# EAGLE board daughterboard (EAGLE 9.6.2)
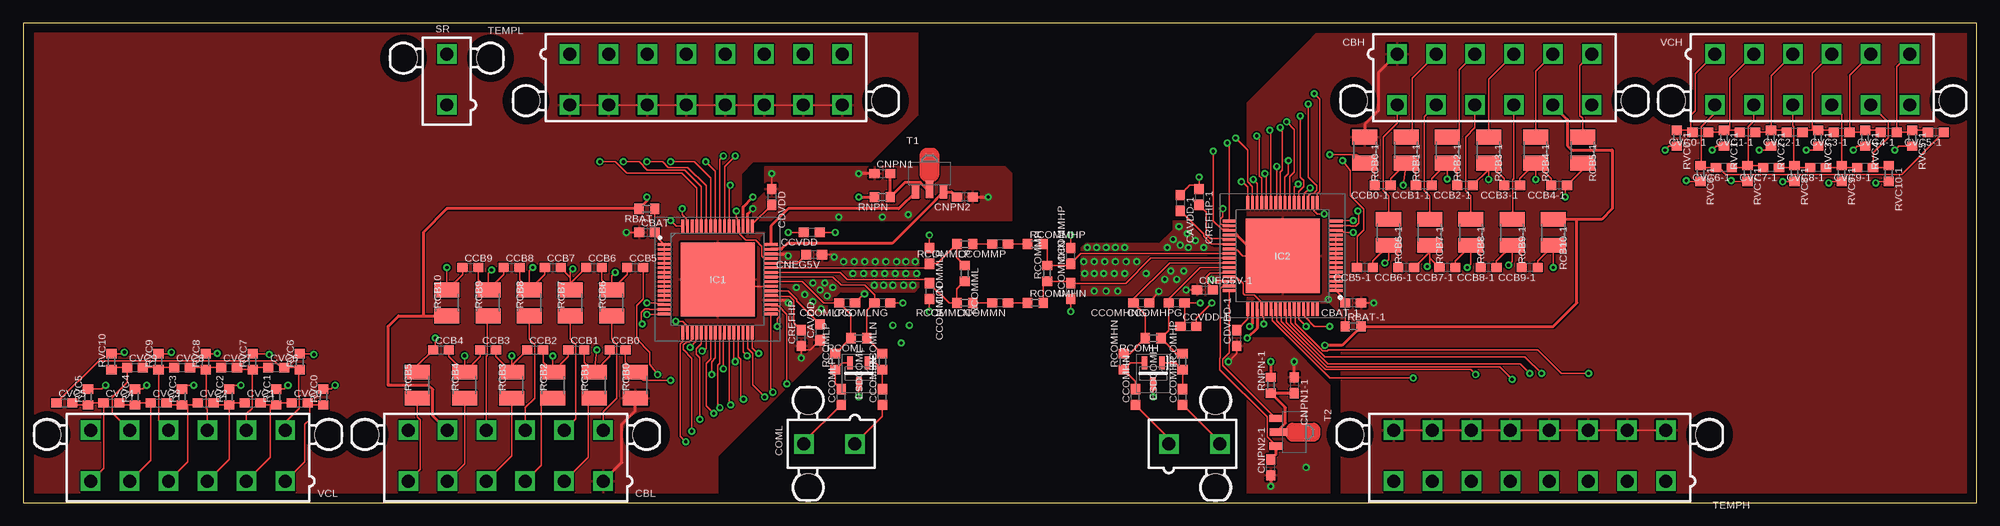
[diagram p0: board, top side]
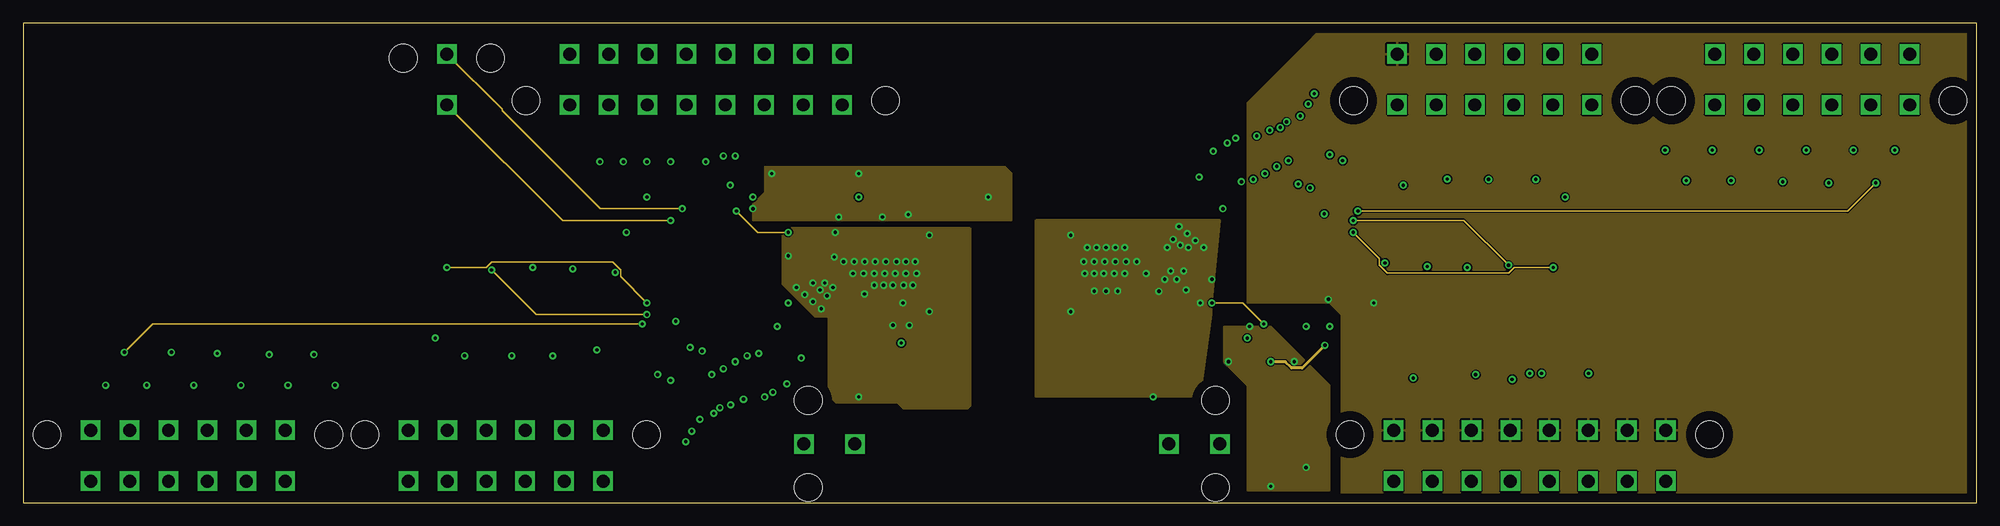
[diagram p1: board, inner layer Route2]
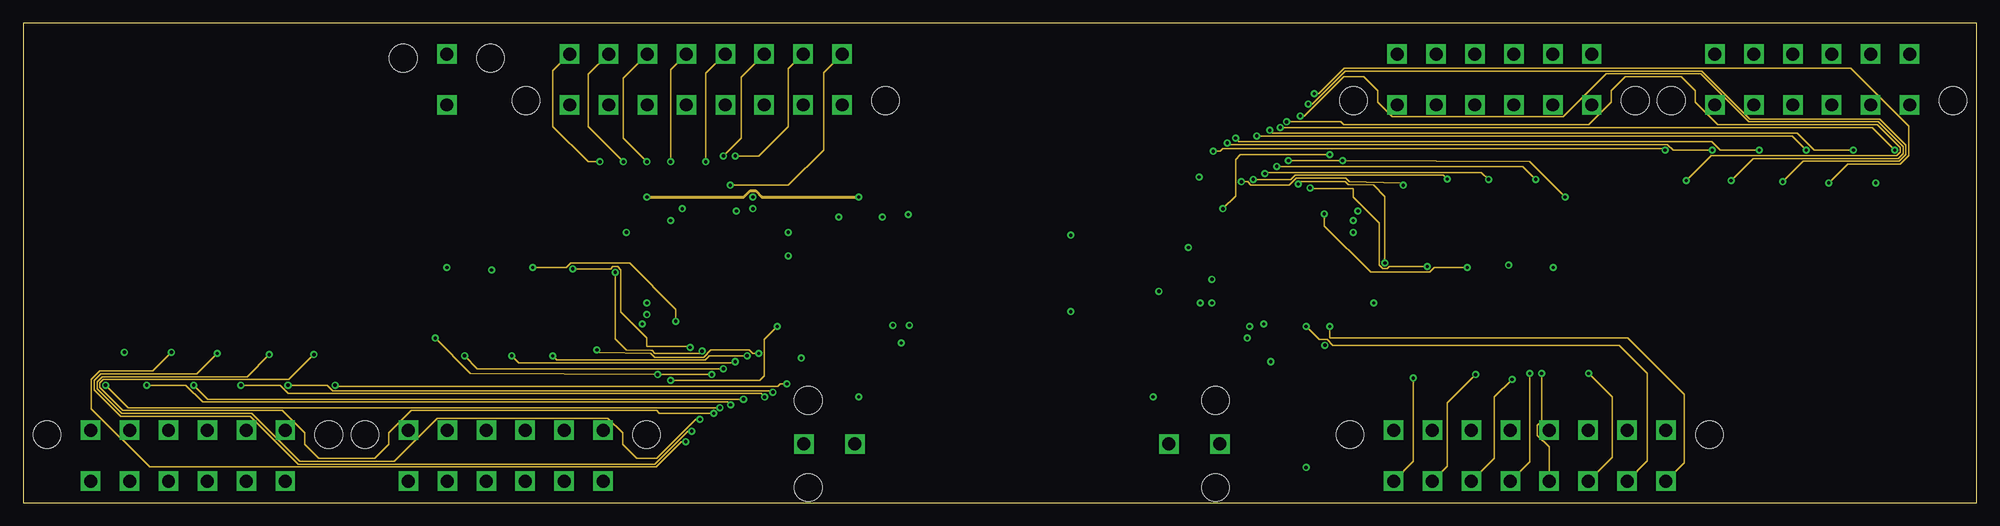
[diagram p2: board, inner layer Route15]
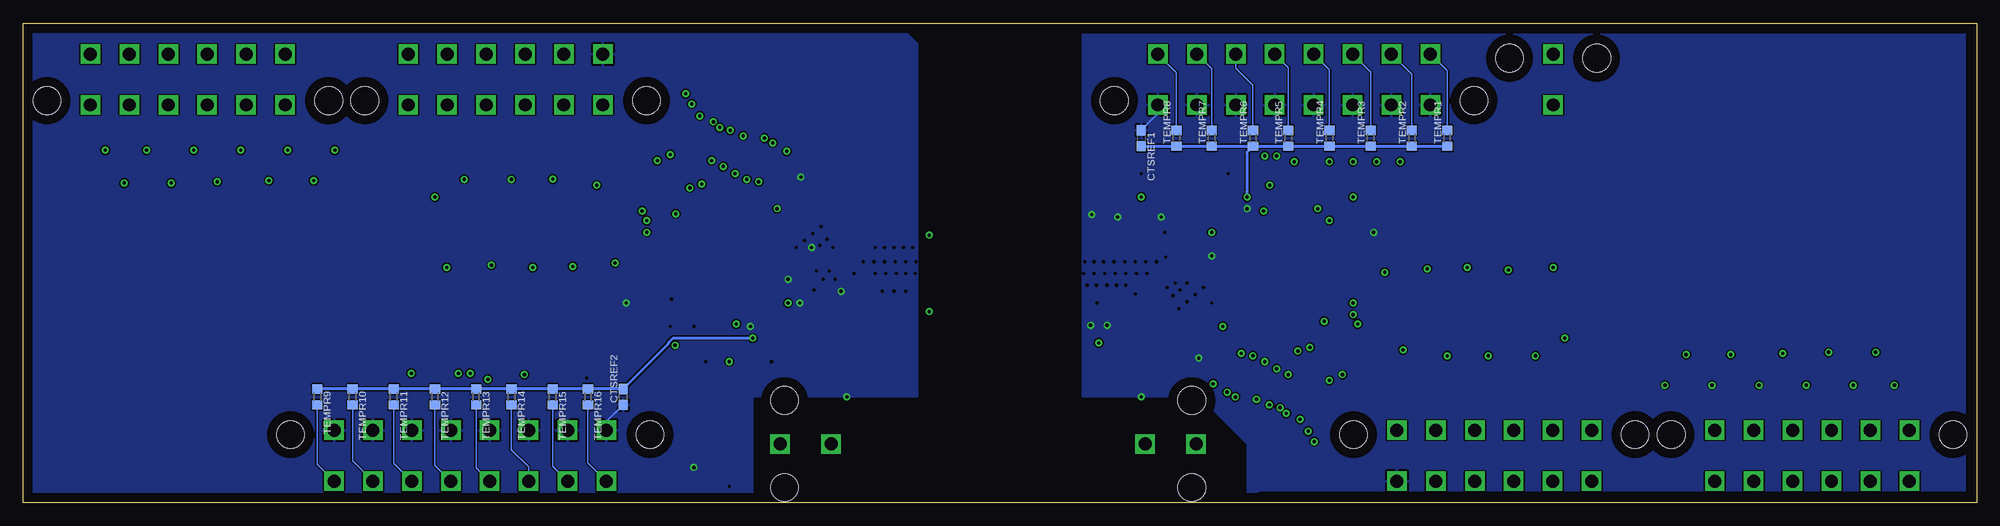
[diagram p3: board, bottom side, seen from below]

Size 210.8 x 51.8 mm. Coordinates in mm from the lower left corner, seen from the top.
Outline: 0,0 210.8,0 210.8,51.8 0,51.8 0,0
Copper layers ([2:[15:1+2*15+16]]): Top 0.035mm / dielectric 0.21mm / Route2 0.035mm / dielectric 1mm / Route15 0.035mm / dielectric 0.21mm / Bottom 0.035mm
Design rules "backup *": minimum track width 6mil, minimum drill 0.35mm, track to track 6mil, track to pad 6mil, pad to pad 6mil, via to via 6mil, smd to smd 6mil, copper to edge 40mil, drill to drill 6mil, minimum pad ring 10mil, minimum via ring 8mil, stop-mask expansion 4mil, vias tented up to drill 0mil, thermal gap 10mil

## Footprints (pad centres in the part's own frame; a part is rotated, then mirrored left to right if it is on the bottom)
C0603 = smd 1.1 x 1: 1 -0.85,0; 2 0.85,0
5566-12 = drill 1.4 square: 1 10.5,-2.75; 2 6.3,-2.75; 3 2.1,-2.75; 4 -2.1,-2.75; 5 -6.3,-2.75; 6 -10.5,-2.75; 7 10.5,2.75; 8 6.3,2.75; 9 2.1,2.75; 10 -2.1,2.75; 11 -6.3,2.75; 12 -10.5,2.75 | hole 3: 15.2,2.29; -15.2,2.29
5566-2 = drill 1.4 square: 1 0,-2.75; 2 0,2.75 | hole 3: 4.7,2.29; -4.7,2.29
SOT95P255X150-3N = smd 1.4 x 0.6: 1 -1.15,0.95; 2 -1.15,-0.95; 3 1.15,0
QFP50P1200X1200X120-65N = smd 1.475 x 0.3: 1 -5.738,3.75; 2 -5.738,3.25; 3 -5.738,2.75; 4 -5.738,2.25; 5 -5.738,1.75; 6 -5.738,1.25; 7 -5.738,0.75; 8 -5.738,0.25; 9 -5.738,-0.25; 10 -5.738,-0.75; 11 -5.738,-1.25; 12 -5.738,-1.75; 13 -5.738,-2.25; 14 -5.738,-2.75; 15 -5.738,-3.25; 16 -5.738,-3.75; 33 5.738,-3.75; 34 5.738,-3.25; 35 5.738,-2.75; 36 5.738,-2.25; 37 5.738,-1.75; 38 5.738,-1.25; 39 5.738,-0.75; 40 5.738,-0.25; 41 5.738,0.25; 42 5.738,0.75; 43 5.738,1.25; 44 5.738,1.75; 45 5.738,2.25; 46 5.738,2.75; 47 5.738,3.25; 48 5.738,3.75 | smd 0.3 x 1.475: 17 -3.75,-5.738; 18 -3.25,-5.738; 19 -2.75,-5.738; 20 -2.25,-5.738; 21 -1.75,-5.738; 22 -1.25,-5.738; 23 -0.75,-5.738; 24 -0.25,-5.738; 25 0.25,-5.738; 26 0.75,-5.738; 27 1.25,-5.738; 28 1.75,-5.738; 29 2.25,-5.738; 30 2.75,-5.738; 31 3.25,-5.738; 32 3.75,-5.738; 49 3.75,5.738; 50 3.25,5.738; 51 2.75,5.738; 52 2.25,5.738; 53 1.75,5.738; 54 1.25,5.738; 55 0.75,5.738; 56 0.25,5.738; 57 -0.25,5.738; 58 -0.75,5.738; 59 -1.25,5.738; 60 -1.75,5.738; 61 -2.25,5.738; 62 -2.75,5.738; 63 -3.25,5.738; 64 -3.75,5.738 | smd 8 x 8: 65 0,0
R0603 = smd 1 x 1.1: 1 -0.85,0; 2 0.85,0
R1210 = smd 1.6 x 2.7: 1 -1.4,0; 2 1.4,0
SOT89-BCE = smd 0.8 x 1.4: B -1.499,-1.981; E 1.499,-1.981 | smd 0.8 x 1.9: C 0,-1.727
5566-16 = drill 1.4 square: 1 14.7,-2.75; 2 10.5,-2.75; 3 6.3,-2.75; 4 2.1,-2.75; 5 -2.1,-2.75; 6 -6.3,-2.75; 7 -10.5,-2.75; 8 -14.7,-2.75; 9 14.7,2.75; 10 10.5,2.75; 11 6.3,2.75; 12 2.1,2.75; 13 -2.1,2.75; 14 -6.3,2.75; 15 -10.5,2.75; 16 -14.7,2.75 | hole 3: 19.4,2.29; -19.4,2.29

## Placement (x,y rotation side)
CAVDD  1uf  [C0603]  85.98,18.41 90 top
CAVDD-1  1uf  [C0603]  124.84,32.38 270 top
CBAT  10 nf  [C0603]  67.31,29.21 0 top
CBAT-1  10 nf  [C0603]  143.51,21.59 180 top
CBH  5566-12  [5566-12]  158.75,45.72 180 top
CBL  5566-12  [5566-12]  52.07,5.08 0 top
CCB0  0.47uf  [C0603]  64.14,16.51 0 top
CCB0-1  0.47uf  [C0603]  146.69,34.29 180 top
CCB1  0.47uf  [C0603]  59.69,16.51 0 top
CCB1-1  0.47uf  [C0603]  151.13,34.29 180 top
CCB2  0.47uf  [C0603]  55.24,16.51 0 top
CCB2-1  0.47uf  [C0603]  155.57,34.29 180 top
CCB3  0.47uf  [C0603]  50.16,16.51 0 top
CCB3-1  0.47uf  [C0603]  160.66,34.29 180 top
CCB4  0.47uf  [C0603]  45.09,16.51 0 top
CCB4-1  0.47uf  [C0603]  165.74,34.29 180 top
CCB5  0.47uf  [C0603]  66.04,25.4 0 top
CCB5-1  0.47uf  [C0603]  144.78,25.4 180 top
CCB6  0.47uf  [C0603]  61.59,25.4 0 top
CCB6-1  0.47uf  [C0603]  149.22,25.4 180 top
CCB7  0.47uf  [C0603]  57.15,25.4 0 top
CCB7-1  0.47uf  [C0603]  153.67,25.4 180 top
CCB8  0.47uf  [C0603]  52.7,25.4 0 top
CCB8-1  0.47uf  [C0603]  158.12,25.4 180 top
CCB9  0.47uf  [C0603]  48.26,25.4 0 top
CCB9-1  0.47uf  [C0603]  162.56,25.4 180 top
CCOMHN  2.2nf  [C0603]  120.02,11.43 90 top
CCOMHNG  220 pF  [C0603]  120.65,21.59 180 top
CCOMHP  2.2nf  [C0603]  125.09,11.43 90 top
CCOMHPG  220 pF  [C0603]  124.46,21.59 180 top
CCOMLN  2.2nf  [C0603]  92.71,11.43 90 top
CCOMLNG  220 pF  [C0603]  92.71,21.59 180 top
CCOMLP  2.2nf  [C0603]  88.27,11.43 90 top
CCOMLPG  220 pF  [C0603]  88.9,21.59 180 top
CCOMMHN  220pf  [C0603]  113.03,22.86 90 top
CCOMMHP  220pf  [C0603]  113.03,26.67 90 top
CCOMMLN  220pf  [C0603]  97.79,22.86 270 top
CCOMMLP  220pf  [C0603]  97.79,26.67 270 top
CCOMMN  2.2nf  [C0603]  105.41,21.59 180 top
CCOMMP  2.2nf  [C0603]  105.41,27.94 180 top
CCVDD  4.7uf  [C0603]  85.09,29.21 180 top
CCVDD-1  4.7uf  [C0603]  125.73,19.05 0 top
CDVDD  1uf  [C0603]  80.77,33.02 270 top
CDVDD-1  1uf  [C0603]  130.94,17.78 90 top
CNEG5V  0.1uf  [C0603]  85.34,26.8 180 top
CNEG5V-1  0.1uf  [C0603]  127.51,22.99 0 top
CNPN1  0.22uf  [C0603]  92.71,35.56 0 top
CNPN1-1  0.22uf  [C0603]  137.16,12.7 270 top
CNPN2  0.1uf  [C0603]  101.6,33.02 180 top
CNPN2-1  0.1uf  [C0603]  134.62,3.81 90 top
COMH  5566-2  [5566-2]  126.36,6.35 270 top
COML  5566-2  [5566-2]  87,6.35 90 top
CREFHP  1uf  [C0603]  83.95,17.78 90 top
CREFHP-1  1uf  [C0603]  126.87,33.02 270 top
CTSREF1  1 uF  [C0603]  90.17,39.37 270 bottom
CTSREF2  1 uF  [C0603]  146.05,11.43 90 bottom
CVC0  0.47uf  [C0603]  29.84,10.79 0 top
CVC0-1  0.47uf  [C0603]  180.97,40.01 180 top
CVC1  0.47uf  [C0603]  24.77,10.79 0 top
CVC1-1  0.47uf  [C0603]  186.06,40.01 180 top
CVC2  0.47uf  [C0603]  19.68,10.79 0 top
CVC2-1  0.47uf  [C0603]  191.13,40.01 180 top
CVC3  0.47uf  [C0603]  14.61,10.79 0 top
CVC3-1  0.47uf  [C0603]  196.22,40.01 180 top
CVC4  0.47uf  [C0603]  9.53,10.79 0 top
CVC4-1  0.47uf  [C0603]  201.29,40.01 180 top
CVC5  0.47uf  [C0603]  4.45,10.79 0 top
CVC5-1  0.47uf  [C0603]  206.38,40.01 180 top
CVC6  0.47uf  [C0603]  27.3,14.61 0 top
CVC6-1  0.47uf  [C0603]  183.51,36.2 180 top
CVC7  0.47uf  [C0603]  22.23,14.61 0 top
CVC7-1  0.47uf  [C0603]  188.59,36.2 180 top
CVC8  0.47uf  [C0603]  17.14,14.61 0 top
CVC8-1  0.47uf  [C0603]  193.68,36.2 180 top
CVC9  0.47uf  [C0603]  12.06,14.61 0 top
CVC9-1  0.47uf  [C0603]  198.75,36.2 180 top
ESDCOMH  ESDAVLC6-2BLY  [SOT95P255X150-3N]  121.92,13.97 270 top
ESDCOML  ESDAVLC6-2BLY  [SOT95P255X150-3N]  90.17,13.97 270 top
IC1  PBQ79656PAPTQ1  [QFP50P1200X1200X120-65N]  74.93,24.13 0 top
IC2  PBQ79656PAPTQ1  [QFP50P1200X1200X120-65N]  135.89,26.67 180 top
RBAT  30  [R0603]  67.31,31.75 180 top
RBAT-1  30  [R0603]  143.51,19.05 0 top
RCB0  10  [R1210]  66.04,12.7 90 top
RCB0-1  10  [R1210]  144.78,38.1 270 top
RCB1  10  [R1210]  61.59,12.7 90 top
RCB1-1  10  [R1210]  149.22,38.1 270 top
RCB2  10  [R1210]  57.15,12.7 90 top
RCB2-1  10  [R1210]  153.67,38.1 270 top
RCB3  10  [R1210]  52.7,12.7 90 top
RCB3-1  10  [R1210]  158.12,38.1 270 top
RCB4  10  [R1210]  47.62,12.7 90 top
RCB4-1  10  [R1210]  163.19,38.1 270 top
RCB5  10  [R1210]  42.55,12.7 90 top
RCB5-1  10  [R1210]  168.28,38.1 270 top
RCB6  10  [R1210]  63.5,21.59 90 top
RCB6-1  10  [R1210]  147.32,29.21 270 top
RCB7  10  [R1210]  59.05,21.59 90 top
RCB7-1  10  [R1210]  151.76,29.21 270 top
RCB8  10  [R1210]  54.61,21.59 90 top
RCB8-1  10  [R1210]  156.21,29.21 270 top
RCB9  10  [R1210]  50.16,21.59 90 top
RCB9-1  10  [R1210]  160.66,29.21 270 top
RCB10  10  [R1210]  45.72,21.59 90 top
RCB10-1  10  [R1210]  165.1,29.21 270 top
RCOMH  1k  [R0603]  121.92,17.78 180 top
RCOMHN  49  [R0603]  118.75,15.24 90 top
RCOMHP  49  [R0603]  125.09,15.24 90 top
RCOML  1k  [R0603]  90.17,17.78 180 top
RCOMLN  49  [R0603]  92.71,15.24 90 top
RCOMLP  49  [R0603]  87.63,15.24 90 top
RCOMMH  1k  [R0603]  110.49,24.77 90 top
RCOMMHN  49  [R0603]  109.22,21.59 0 top
RCOMMHP  49  [R0603]  109.22,27.94 0 top
RCOMML  1k  [R0603]  101.6,24.77 270 top
RCOMMLN  49  [R0603]  101.6,21.59 180 top
RCOMMLP  49  [R0603]  101.6,27.94 180 top
RNPN  49  [R0603]  92.71,33.02 180 top
RNPN-1  49  [R0603]  134.62,12.7 90 top
RVC0  100  [R0603]  32.38,11.43 90 top
RVC0-1  100  [R0603]  178.44,39.37 270 top
RVC1  100  [R0603]  27.3,11.43 90 top
RVC1-1  100  [R0603]  183.51,39.37 270 top
RVC2  100  [R0603]  22.23,11.43 90 top
RVC2-1  100  [R0603]  188.59,39.37 270 top
RVC3  100  [R0603]  17.14,11.43 90 top
RVC3-1  100  [R0603]  193.68,39.37 270 top
RVC4  100  [R0603]  12.06,11.43 90 top
RVC4-1  100  [R0603]  198.75,39.37 270 top
RVC5  100  [R0603]  6.99,11.43 90 top
RVC5-1  100  [R0603]  203.84,39.37 270 top
RVC6  100  [R0603]  29.84,15.24 90 top
RVC6-1  100  [R0603]  180.97,35.56 270 top
RVC7  100  [R0603]  24.77,15.24 90 top
RVC7-1  100  [R0603]  186.06,35.56 270 top
RVC8  100  [R0603]  19.68,15.24 90 top
RVC8-1  100  [R0603]  191.13,35.56 270 top
RVC9  100  [R0603]  14.61,15.24 90 top
RVC9-1  100  [R0603]  196.22,35.56 270 top
RVC10  100  [R0603]  9.53,15.24 90 top
RVC10-1  100  [R0603]  201.29,35.56 270 top
SR  5566-2  [5566-2]  45.72,45.72 0 top
T1  PBHV8115X, 115  [SOT89-BCE]  97.79,35.56 0 top
T2  PBHV8115X, 115  [SOT89-BCE]  137.16,7.62 270 top
TEMPH  5566-16  [5566-16]  162.56,5.08 0 top
TEMPL  5566-16  [5566-16]  73.66,45.72 180 top
TEMPR1  10k  [R0603]  57.15,39.37 90 bottom
TEMPR2  10k  [R0603]  60.96,39.37 90 bottom
TEMPR3  10k  [R0603]  65.41,39.37 90 bottom
TEMPR4  10k  [R0603]  69.85,39.37 90 bottom
TEMPR5  10k  [R0603]  74.3,39.37 90 bottom
TEMPR6  10k  [R0603]  78.11,39.37 90 bottom
TEMPR7  10k  [R0603]  82.55,39.37 90 bottom
TEMPR8  10k  [R0603]  86.36,39.37 90 bottom
TEMPR9  10k  [R0603]  179.07,11.43 270 bottom
TEMPR10  10k  [R0603]  175.26,11.43 270 bottom
TEMPR11  10k  [R0603]  170.81,11.43 270 bottom
TEMPR12  10k  [R0603]  166.37,11.43 270 bottom
TEMPR13  10k  [R0603]  161.93,11.43 270 bottom
TEMPR14  10k  [R0603]  158.12,11.43 270 bottom
TEMPR15  10k  [R0603]  153.67,11.43 270 bottom
TEMPR16  10k  [R0603]  149.86,11.43 270 bottom
VCH  5566-12  [5566-12]  193.04,45.72 180 top
VCL  5566-12  [5566-12]  17.78,5.08 0 top

## Library data of the parts
CAVDD CAVDD-1 CBAT CBAT-1 CCB0 CCB0-1 CCB1 CCB1-1 CCB2 CCB2-1 CCB3 CCB3-1 CCB4 CCB4-1 CCB5 CCB5-1 CCB6 CCB6-1 CCB7 CCB7-1 CCB8 CCB8-1 CCB9 CCB9-1 CCOMHN CCOMHNG CCOMHP CCOMHPG CCOMLN CCOMLNG CCOMLP CCOMLPG CCOMMHN CCOMMHP CCOMMLN CCOMMLP CCOMMN CCOMMP CCVDD CCVDD-1 CDVDD CDVDD-1 CNEG5V CNEG5V-1 CNPN1 CNPN1-1 CNPN2 CNPN2-1 CREFHP CREFHP-1 CTSREF1 CTSREF2 CVC0 CVC0-1 CVC1 CVC1-1 CVC2 CVC2-1 CVC3 CVC3-1 CVC4 CVC4-1 CVC5 CVC5-1 CVC6 CVC6-1 CVC7 CVC7-1 CVC8 CVC8-1 CVC9 CVC9-1 = rcl; SPICEPREFIX: C
CBH CBL TEMPH TEMPL VCH VCL = con-molex; MF: MOLEX; OC_FARNELL: unknown; OC_NEWARK: unknown
COMH COML SR = con-molex; MF: MOLEX; OC_FARNELL: 1822072; OC_NEWARK: unknown
ESDCOMH ESDCOML = ESDAVLC6-2BLY; DESCRIPTION: STMICROELECTRONICS - ESDAVLC6-2BLY - ESD Protection Device, 17 V, SOT-23, 3 Pins, 5 V, 140 W, ESDA Transil Series; HEIGHT: 1.5mm; MANUFACTURER_NAME: STMicroelectronics; MANUFACTURER_PART_NUMBER: ESDAVLC6-2BLY; MOUSER_PART_NUMBER: 511-ESDAVLC6-2BLY; MOUSER_PRICE-STOCK: https://www.mouser.co.uk/ProductDetail/STMicroelectronics/ESDAVLC6-2BLY?qs=l7cgNqFNU1iH2e21evvYsA%3D%3D
IC1 IC2 = PBQ79656PAPTQ1; DESCRIPTION: BQ7965x-Q1 Family of 12S, 14S, 16S Precision Automotive Battery Monitor, Balancer and Integrated Hardware Protector with up to SafeTITM-26262 ASIL-D Compliance; HEIGHT: 1.2mm; MANUFACTURER_NAME: Texas Instruments; MANUFACTURER_PART_NUMBER: PBQ79656PAPTQ1
RBAT RBAT-1 RCB0 RCB0-1 RCB1 RCB1-1 RCB2 RCB2-1 RCB3 RCB3-1 RCB4 RCB4-1 RCB5 RCB5-1 RCB6 RCB6-1 RCB7 RCB7-1 RCB8 RCB8-1 RCB9 RCB9-1 RCB10 RCB10-1 RCOMH RCOMHN RCOMHP RCOML RCOMLN RCOMLP RCOMMH RCOMMHN RCOMMHP RCOMML RCOMMLN RCOMMLP RNPN RNPN-1 RVC0 RVC0-1 RVC1 RVC1-1 RVC2 RVC2-1 RVC3 RVC3-1 RVC4 RVC4-1 RVC5 RVC5-1 RVC6 RVC6-1 RVC7 RVC7-1 RVC8 RVC8-1 RVC9 RVC9-1 RVC10 RVC10-1 TEMPR1-TEMPR16 = rcl; SPICEPREFIX: R
T1 T2 = transistor

## Nets
BATC: CBL.11 RBAT.2 RCB10.1 RNPN.2
BATC-1: CBH.11 RBAT-1.2 RCB10-1.1 RNPN-1.2
CB0: CCB0.2 IC1.34 RCB0.2
CB0-1: CCB0-1.2 IC2.34 RCB0-1.2
CB1: CCB0.1 CCB1.2 IC1.32 RCB1.2
CB1-1: CCB0-1.1 CCB1-1.2 IC2.32 RCB1-1.2
CB2: CCB1.1 CCB2.2 IC1.30 RCB2.2
CB2-1: CCB1-1.1 CCB2-1.2 IC2.30 RCB2-1.2
CB3: CCB2.1 CCB3.2 IC1.28 RCB3.2
CB3-1: CCB2-1.1 CCB3-1.2 IC2.28 RCB3-1.2
CB4: CCB3.1 CCB4.2 IC1.26 RCB4.2
CB4-1: CCB3-1.1 CCB4-1.2 IC2.26 RCB4-1.2
CB5: CCB4.1 CCB5.2 IC1.24 RCB5.2
CB5-1: CCB4-1.1 CCB5-1.2 IC2.24 RCB5-1.2
CB6: CCB5.1 CCB6.2 IC1.22 RCB6.2
CB6-1: CCB5-1.1 CCB6-1.2 IC2.22 RCB6-1.2
CB7: CCB6.1 CCB7.2 IC1.20 RCB7.2
CB7-1: CCB6-1.1 CCB7-1.2 IC2.20 RCB7-1.2
CB8: CCB7.1 CCB8.2 IC1.18 RCB8.2
CB8-1: CCB7-1.1 CCB8-1.2 IC2.18 RCB8-1.2
CB9: CCB8.1 CCB9.2 IC1.16 RCB9.2
CB9-1: CCB8-1.1 CCB9-1.2 IC2.16 RCB9-1.2
CB10: CCB9.1 IC1.14 RCB10.2
CB10-1: CCB9-1.1 IC2.14 RCB10-1.2
COMHN: CCOMHN.1 COMH.1
COMHP: CCOMHP.1 COMH.2
COMLN: CCOMLN.1 COML.1
COMLP: CCOMLP.1 COML.2
COMMN: CCOMMN.1 RCOMMHN.1
COMMP: CCOMMP.1 RCOMMHP.1
CVDD: CCVDD.2 IC1.45 IC1.52
CVDD-1: CCVDD-1.2 IC2.45 IC2.52
GNDH: CAVDD-1.1 CBAT-1.1 CBH.1 CCOMHNG.1 CCOMHPG.1 CCOMMHN.1 CCOMMHP.2 CCVDD-1.1 CDVDD-1.1 CNEG5V-1.1 CNPN1-1.1 CNPN2-1.1 CREFHP-1.1 CTSREF2.1 ESDCOMH.3 IC2.36 IC2.39 IC2.46 IC2.50 IC2.65 RCB0-1.1 TEMPH.9 TEMPH.10 TEMPH.11 TEMPH.12 TEMPH.13 TEMPH.14 TEMPH.15 TEMPH.16
GNDL: CAVDD.1 CBAT.1 CBL.1 CCOMLNG.1 CCOMLPG.1 CCOMMLN.2 CCOMMLP.1 CCVDD.1 CDVDD.1 CNEG5V.1 CNPN1.1 CNPN2.1 CREFHP.1 CTSREF1.1 ESDCOML.3 IC1.36 IC1.39 IC1.46 IC1.50 IC1.65 RCB0.1 TEMPL.9 TEMPL.10 TEMPL.11 TEMPL.12 TEMPL.13 TEMPL.14 TEMPL.15 TEMPL.16
LDOIN: CNPN2.2 IC1.47 T1.E
LDOIN-1: CNPN2-1.2 IC2.47 T2.E
N$1: CCOMHP.2 ESDCOMH.1 RCOMHP.1
N$2: CCOMHN.2 ESDCOMH.2 RCOMHN.1
N$4: IC1.64 SR.1
N$5: CBL.2 RCB1.1
N$6: CBL.3 RCB2.1
N$7: IC1.63 SR.2
N$8: CBL.4 RCB3.1
N$12: CBL.5 RCB4.1
N$15: CBL.6 RCB5.1
N$18: CBL.9 RCB8.1
N$21: CBL.10 RCB9.1
N$27: CBL.7 RCB6.1
N$29: CCOMLNG.2 IC1.41 RCOML.1 RCOMLN.2
N$31: CBL.8 RCB7.1
N$33: CREFHP.2 IC1.37
N$34: CVC0.2 RVC0.1 VCL.1
N$35: CVC0.1 CVC1.2 RVC1.1 VCL.2
N$36: CVC1.1 CVC2.2 RVC2.1 VCL.3
N$37: CVC2.1 CVC3.2 RVC3.1 VCL.4
N$38: CVC3.1 CVC4.2 RVC4.1 VCL.5
N$39: CVC4.1 CVC5.2 RVC5.1 VCL.6
N$40: CVC5.1 CVC6.2 RVC6.1 VCL.7
N$41: CVC6.1 CVC7.2 RVC7.1 VCL.8
N$42: CVC7.1 CVC8.2 RVC8.1 VCL.9
N$43: CVC8.1 CVC9.2 RVC9.1 VCL.10
N$44: CVC9.1 RVC10.1 VCL.11
N$46: CAVDD.2 IC1.38
N$48: CNEG5V.2 IC1.44
N$49: CCOMLPG.2 IC1.40 RCOML.2 RCOMLP.2
N$50: CDVDD.2 IC1.49
N$59: CCOMMLN.1 IC1.42 RCOMML.2 RCOMMLN.2
N$60: CCOMMLP.2 IC1.43 RCOMML.1 RCOMMLP.2
N$61: CCOMMN.2 RCOMMLN.1
N$62: CCOMMP.2 RCOMMLP.1
N$65: CNPN1.2 RNPN.1 T1.C
N$67: CCOMLP.2 ESDCOML.2 RCOMLP.1
N$68: CCOMLN.2 ESDCOML.1 RCOMLN.1
N$72: CBH.3 RCB2-1.1
N$73: CBH.2 RCB1-1.1
N$75: CBH.4 RCB3-1.1
N$78: CBH.5 RCB4-1.1
N$81: CBH.6 RCB5-1.1
N$84: CBH.7 RCB6-1.1
N$87: CBH.8 RCB7-1.1
N$90: CBH.9 RCB8-1.1
N$93: CBH.10 RCB9-1.1
N$99: CVC0-1.2 RVC0-1.1 VCH.1
N$100: CVC0-1.1 CVC1-1.2 RVC1-1.1 VCH.2
N$101: CVC1-1.1 CVC2-1.2 RVC2-1.1 VCH.3
N$102: CVC2-1.1 CVC3-1.2 RVC3-1.1 VCH.4
N$103: CVC3-1.1 CVC4-1.2 RVC4-1.1 VCH.5
N$104: CVC4-1.1 CVC5-1.2 RVC5-1.1 VCH.6
N$105: CVC5-1.1 CVC6-1.2 RVC6-1.1 VCH.7
N$106: CVC6-1.1 CVC7-1.2 RVC7-1.1 VCH.8
N$107: CVC7-1.1 CVC8-1.2 RVC8-1.1 VCH.9
N$108: CVC8-1.1 CVC9-1.2 RVC9-1.1 VCH.10
N$109: CVC9-1.1 RVC10-1.1 VCH.11
N$111: CREFHP-1.2 IC2.37
N$112: CAVDD-1.2 IC2.38
N$113: CNEG5V-1.2 IC2.44
N$114: CDVDD-1.2 IC2.49
N$125: CCOMMHN.2 IC2.41 RCOMMH.1 RCOMMHN.2
N$126: CCOMMHP.1 IC2.40 RCOMMH.2 RCOMMHP.2
N$130: CNPN1-1.2 RNPN-1.1 T2.C
N$131: CCOMHPG.2 IC2.43 RCOMH.1 RCOMHP.2
N$132: CCOMHNG.2 IC2.42 RCOMH.2 RCOMHN.2
NPNB: IC1.48 T1.B
NPNB-1: IC2.48 T2.B
TEMP1: IC1.61 TEMPL.1 TEMPR1.2
TEMP2: IC1.60 TEMPL.2 TEMPR2.2
TEMP3: IC1.59 TEMPL.3 TEMPR3.2
TEMP4: IC1.58 TEMPL.4 TEMPR4.2
TEMP5: IC1.57 TEMPL.5 TEMPR5.2
TEMP6: IC1.56 TEMPL.6 TEMPR6.2
TEMP7: IC1.55 TEMPL.7 TEMPR7.2
TEMP8: IC1.54 TEMPL.8 TEMPR8.2
TEMP9: IC2.61 TEMPH.1 TEMPR9.2
TEMP10: IC2.60 TEMPH.2 TEMPR10.2
TEMP11: IC2.59 TEMPH.3 TEMPR11.2
TEMP12: IC2.58 TEMPH.4 TEMPR12.2
TEMP13: IC2.57 TEMPH.5 TEMPR13.2
TEMP14: IC2.56 TEMPH.6 TEMPR14.2
TEMP15: IC2.55 TEMPH.7 TEMPR15.2
TEMP16: IC2.54 TEMPH.8 TEMPR16.2
TSREF: CTSREF1.2 IC1.51 TEMPR1.1 TEMPR2.1 TEMPR3.1 TEMPR4.1 TEMPR5.1 TEMPR6.1 TEMPR7.1 TEMPR8.1
TSREF-1: CTSREF2.2 IC2.51 TEMPR9.1 TEMPR10.1 TEMPR11.1 TEMPR12.1 TEMPR13.1 TEMPR14.1 TEMPR15.1 TEMPR16.1
VC0: IC1.35 RVC0.2
VC0-1: IC2.35 RVC0-1.2
VC1: IC1.33 RVC1.2
VC1-1: IC2.33 RVC1-1.2
VC2: IC1.31 RVC2.2
VC2-1: IC2.31 RVC2-1.2
VC3: IC1.29 RVC3.2
VC3-1: IC2.29 RVC3-1.2
VC4: IC1.27 RVC4.2
VC4-1: IC2.27 RVC4-1.2
VC5: IC1.25 RVC5.2
VC5-1: IC2.25 RVC5-1.2
VC6: IC1.23 RVC6.2
VC6-1: IC2.23 RVC6-1.2
VC7: IC1.21 RVC7.2
VC7-1: IC2.21 RVC7-1.2
VC8: IC1.19 RVC8.2
VC8-1: IC2.19 RVC8-1.2
VC9: IC1.17 RVC9.2
VC9-1: IC2.17 RVC9-1.2
VC10: IC1.15 RVC10.2
VC10-1: IC2.15 RVC10-1.2
VC_CB_HIGH: CBAT.2 IC1.1 IC1.2 IC1.3 IC1.4 IC1.5 IC1.6 IC1.7 IC1.8 IC1.9 IC1.10 IC1.11 IC1.12 IC1.13 RBAT.1
VC_CB_HIGH-1: CBAT-1.2 IC2.1 IC2.2 IC2.3 IC2.4 IC2.5 IC2.6 IC2.7 IC2.8 IC2.9 IC2.10 IC2.11 IC2.12 IC2.13 RBAT-1.1

## Tracks (layer width: path | path; a pad name or v marks a point on that pad's centre or on a via)
BATC  (via drill 0.35)
  Top 0.305: CBL.11 44.2,9.4 44.2,12.23 43.73,12.7 39.37,12.7 39.37,19.05 40.51,20.19 43.18,20.19 | 43.18,20.19 RCB10.1 | 43.18,20.19 43.18,29.21 45.72,31.75 RBAT.2 67.31,32.6 v67.31,33.02 | v90.17,33.02 RNPN.2
  Route15 0.305: v67.31,33.02 77.77,33.02 78.46,33.7 79.02,33.7 79.71,33.02 v90.17,33.02
BATC-1  (via drill 0.35)
  Top 0.305: CBH.11 166.62,41.4 166.62,38.57 167.09,38.1 171.45,38.1 171.45,31.75 170.31,30.61 167.64,30.61 | 167.64,30.61 RCB10-1.1 | 167.64,30.61 167.64,21.59 165.1,19.05 RBAT-1.2 142.33,17.02 v140.46,17.02 | v134.62,15.24 RNPN-1.2
  Route2 0.305: v134.62,15.24 136.19,15.24 136.88,14.56 138,14.56 v140.46,17.02
CB0  (via drill 0.35)
  Top 0.152: CCB0.2 64.98,15.15 RCB0.2 66.93,13.21 v69.85,13.21 | IC1.34 80.79,20.76 81.5,20.76 81.63,20.62 81.63,20.14 81.37,19.87 v81.37,19.05
  Route15 0.152: v81.37,19.05 79.98,17.66 79.98,13.72 79.47,13.21 v69.85,13.21
CB0-1  (via drill 0.35)
  Top 0.152: CCB0-1.2 145.84,35.65 RCB0-1.2 143.89,37.59 v140.97,37.59 | IC2.34 130.03,30.04 129.32,30.04 129.19,30.18 129.19,30.66 129.45,30.93 v129.45,31.75
  Route15 0.152: v129.45,31.75 130.84,33.14 130.84,37.08 131.35,37.59 v140.97,37.59
CB1  (via drill 0.35)
  Top 0.152: RCB1.2 63.28,15.79 CCB0.1 | RCB1.2 60.54,15.15 CCB1.2 | RCB1.2 v61.91,16.51 | v79.38,16.13 79.25,16.13 78.68,16.7 IC1.32
  Route15 0.152: v61.91,16.51 62.17,16.25 67.73,16.13 68.14,15.72 73.46,15.72 74.22,16.48 78.36,16.48 78.71,16.13 v79.38,16.13
CB1-1  (via drill 0.35)
  Top 0.152: RCB1-1.2 147.53,35.01 CCB0-1.1 | RCB1-1.2 150.28,35.65 CCB1-1.2 | RCB1-1.2 v148.91,34.29 | v131.44,34.67 131.56,34.67 132.14,34.1 IC2.32
  Route15 0.152: v148.91,34.29 148.65,34.55 143.09,34.67 142.68,35.08 137.36,35.08 136.6,34.32 132.46,34.32 132.11,34.67 v131.44,34.67
CB2  (via drill 0.35)
  Top 0.152: RCB2.2 58.84,15.79 CCB1.1 | RCB2.2 56.09,15.15 CCB2.2 | RCB2.2 v57.15,15.85 | IC1.30 77.68,16.3 v78.11,15.88
  Route15 0.152: v78.11,15.88 74.04,15.88 73.58,15.42 57.58,15.42 v57.15,15.85
CB2-1  (via drill 0.35)
  Top 0.152: RCB2-1.2 151.98,35.01 CCB1-1.1 | RCB2-1.2 154.72,35.65 CCB2-1.2 | RCB2-1.2 v153.67,34.95 | IC2.30 133.14,34.5 v132.72,34.92
  Route15 0.152: v132.72,34.92 136.78,34.92 137.24,35.38 153.24,35.38 v153.67,34.95
CB3  (via drill 0.35)
  Top 0.152: RCB3.2 52.7,14.82 CCB2.1 | RCB3.2 51.02,15.79 CCB3.2 | RCB3.2 v52.7,15.88 | v76.83,15.24 76.68,15.39 IC1.28
  Route15 0.152: v52.7,15.88 53.47,15.11 76.71,15.11 v76.83,15.24
CB3-1  (via drill 0.35)
  Top 0.152: RCB3-1.2 158.12,35.98 CCB2-1.1 | RCB3-1.2 159.81,35.01 CCB3-1.2 | RCB3-1.2 v158.12,34.92 | v133.99,35.56 134.14,35.41 IC2.28
  Route15 0.152: v158.12,34.92 157.35,35.69 134.11,35.69 v133.99,35.56
CB4  (via drill 0.35)
  Top 0.152: RCB4.2 49.31,15.79 CCB3.1 | RCB4.2 45.94,15.79 CCB4.2 | RCB4.2 v47.62,15.88 | v75.56,14.48 75.56,18.28 IC1.26
  Route15 0.152: v75.56,14.48 49.02,14.48 v47.62,15.88
CB4-1  (via drill 0.35)
  Top 0.152: RCB4-1.2 161.5,35.01 CCB3-1.1 | RCB4-1.2 164.88,35.01 CCB4-1.2 | RCB4-1.2 v163.19,34.92 | v135.25,36.32 135.25,32.52 IC2.26
  Route15 0.152: v135.25,36.32 161.8,36.32 v163.19,34.92
CB5  (via drill 0.35)
  Top 0.152: RCB5.2 42.55,14.82 CCB4.1 44.45,16.73 v44.45,17.78 | v74.3,13.84 74.3,15.24 74.68,15.62 IC1.24 | v68.45,13.84 67.62,14.93 67.62,16.27 66.19,17.69 66.19,21.33 66.89,22.03 CCB5.2
  Route15 0.152: v44.45,17.78 48.26,13.97 v68.45,13.84 v74.3,13.84
CB5-1  (via drill 0.35)
  Top 0.152: RCB5-1.2 168.28,35.98 CCB4-1.1 166.37,34.08 v166.37,33.02 | v136.53,36.96 136.53,35.56 136.14,35.17 IC2.24 | v142.37,36.96 143.2,35.87 143.2,33.17 144.62,31.75 144.62,29.47 143.93,28.77 CCB5-1.2
  Route15 0.152: v166.37,33.02 162.56,36.83 v142.37,36.96 v136.53,36.96
CB6  (via drill 0.35)
  Top 0.152: RCB6.2 62.45,24.05 CCB6.2 | RCB6.2 65.19,24.68 CCB5.1 | RCB6.2 63.5,24.51 v63.88,24.89 | IC1.22 73.68,16.64 73.5,16.64 v73.25,16.38
  Route15 0.152: v63.88,24.89 63.88,17.7 65.09,16.49 67.74,16.43 67.86,16.43 68.17,16.13 73,16.13 v73.25,16.38
CB6-1  (via drill 0.35)
  Top 0.152: RCB6-1.2 148.38,26.75 CCB6-1.2 | RCB6-1.2 145.63,26.12 CCB5-1.1 | RCB6-1.2 147.32,26.29 v146.94,25.91 | IC2.22 137.14,34.16 137.31,34.16 v137.57,34.42
  Route15 0.152: v146.94,25.91 146.94,33.1 145.73,34.31 143.08,34.37 142.96,34.37 142.65,34.67 137.82,34.67 v137.57,34.42
CB7  (via drill 0.35)
  Top 0.152: RCB7.2 59.05,24.34 CCB7.2 | RCB7.2 59.05,23.71 CCB6.1 | RCB7.2 59.05,25.02 v59.31,25.27 | v71.96,16.79 72.59,17.42 72.59,18.3 IC1.20
  Route15 0.152: v59.31,25.27 63.4,25.27 63.63,25.5 64.13,25.5 64.49,25.14 64.49,20.6 67.31,17.78 67.31,16.87 71.88,16.87 v71.96,16.79
CB7-1  (via drill 0.35)
  Top 0.152: RCB7-1.2 151.76,26.45 CCB7-1.2 | RCB7-1.2 151.76,27.09 CCB6-1.1 | RCB7-1.2 151.76,25.78 v151.51,25.53 | v138.86,34.01 138.23,33.38 138.23,32.49 IC2.20
  Route15 0.152: v151.51,25.53 147.42,25.53 147.19,25.3 146.69,25.3 146.33,25.66 146.33,30.2 143.51,33.02 143.51,33.93 138.94,33.93 v138.86,34.01
CB8  (via drill 0.35)
  Top 0.152: RCB8.2 53.55,24.05 CCB8.2 | RCB8.2 56.3,24.68 CCB7.1 | RCB8.2 54.61,25.02 v54.99,25.4 | IC1.18 71.56,18.51 71.56,19.22 71.18,19.6 v70.42,19.6
  Route15 0.152: v54.99,25.4 58.58,25.4 59.06,25.88 65.43,25.88 70.42,20.89 v70.42,19.6
CB8-1  (via drill 0.35)
  Top 0.152: RCB8-1.2 157.26,26.75 CCB8-1.2 | RCB8-1.2 154.52,26.12 CCB7-1.1 | RCB8-1.2 156.21,25.78 v155.83,25.4 | IC2.18 139.26,32.29 139.26,31.58 139.64,31.2 v140.4,31.2
  Route15 0.152: v155.83,25.4 152.24,25.4 151.76,24.92 145.39,24.92 140.4,29.91 v140.4,31.2
CB9  (via drill 0.35)
  Top 0.152: RCB9.2 49.11,24.05 CCB9.2 | RCB9.2 51.85,24.68 CCB8.1 | RCB9.2 50.16,24.77 v50.55,25.15 | v67.31,20.32 69.13,20.32 IC1.16
  Route2 0.152: v50.55,25.15 55.37,20.32 v67.31,20.32
CB9-1  (via drill 0.35)
  Top 0.152: RCB9-1.2 161.71,26.75 CCB9-1.2 | RCB9-1.2 158.97,26.12 CCB8-1.1 | RCB9-1.2 160.66,26.04 v160.27,25.65 | v143.51,30.48 141.69,30.48 IC2.16
  Route2 0.152: v160.27,25.65 155.45,30.48 v143.51,30.48
CB10  (via drill 0.35)
  Top 0.152: CCB9.1 47.41,24.68 RCB10.2 v45.72,25.4 | v67.31,21.59 68.27,21.59 68.36,21.5 69.07,21.5 IC1.14
  Route2 0.152: v45.72,25.4 49.94,25.4 50.55,26.01 63.62,26.01 64.49,25.14 64.49,24.41 v67.31,21.59
CB10-1  (via drill 0.35)
  Top 0.152: CCB9-1.1 163.41,26.12 RCB10-1.2 v165.1,25.4 | v143.51,29.21 142.55,29.21 142.46,29.3 141.75,29.3 IC2.14
  Route2 0.152: v165.1,25.4 160.88,25.4 160.27,24.79 147.2,24.79 146.33,25.66 146.33,26.39 v143.51,29.21
COMHN
  Top 0.152: CCOMHN.1 123.61,6.98 COMH.1
COMHP
  Top 0.152: CCOMHP.1 129.12,6.56 COMH.2
COMLN
  Top 0.152: CCOMLN.1 92.71,9.31 COML.1
COMLP
  Top 0.152: CCOMLP.1 84.25,6.56 COML.2
COMMN
  Top 0.152: CCOMMN.1 RCOMMHN.1
COMMP
  Top 0.152: CCOMMP.1 RCOMMHP.1
CVDD  (via drill 0.35)
  Top 0.152: IC1.45 80.55,26.5 79.84,26.5 79.7,26.64 79.7,27.68 79.03,28.36 77.98,28.36 77.3,29.04 77.3,29.75 IC1.52 77.06,29.99 77.06,30.7 76.96,30.8 v76.96,31.5 | v82.55,29.21 CCVDD.2
  Route2 0.152: v76.96,31.5 79.25,29.21 v82.55,29.21
CVDD-1  (via drill 0.35)
  Top 0.152: IC2.45 130.27,24.3 130.98,24.3 131.63,23.66 131.63,22.61 131.79,22.44 132.84,22.44 133.52,21.76 133.52,21.05 IC2.52 133.76,20.81 133.76,20.1 133.86,20 v133.86,19.3 | v128.27,21.59 126.58,19.9 CCVDD-1.2
  Route2 0.152: v133.86,19.3 131.57,21.59 v128.27,21.59
GNDH  (via drill 0.35, 0.35 layers 1-2)
  Top 0.152: ESDCOMH.3 v121.92,11.43 | CCOMMHN.1 v113.03,20.64 | CCOMMHP.2 v113.03,28.89 | CCOMHNG.1 v122.56,22.83 | v127,21.59 CCOMHPG.1 125.31,19.48 CCVDD-1.1 | CDVDD-1.1 130.94,16.13 v130.05,15.24 | CREFHP-1.1 126.87,34.29 | 126.87,34.29 v126.87,35.18 | CAVDD-1.1 125.9,34.29 126.87,34.29 | TEMPH.9 TEMPH.10 TEMPH.11 TEMPH.12 TEMPH.13 TEMPH.14 TEMPH.15 TEMPH.16 | CBAT-1.1 v145.73,21.59 | CNEG5V-1.1 v125.48,22.99 | IC2.39 130.27,27.3 130.98,27.3 131.61,26.67 134.62,26.67 IC2.65
  Top 0.305: IC2.50 132.64,19.36 v132.33,19.05 | IC2.46 128.48,23.92 v128.27,24.13 | CNPN1-1.1 v137.16,15.24 | RCB0-1.1 144.78,40.89 146.22,42.33 146.22,46.44 CBH.1 | CNPN2-1.1 v134.62,1.78 | 134.62,26.67 133.22,26.67 130.97,28.92 IC2.36
  Bottom 0.152: CTSREF2.1 147.86,8.77 TEMPH.16
  other vias: 124.84,27.81 124.08,28.45 123.44,27.56 120.14,26.04 118.87,27.56 117.86,27.56 116.84,27.56 115.82,27.56 114.81,27.56 119,26.04 117.86,26.04 116.71,26.04 115.57,26.04 114.43,26.04 114.55,24.77 115.57,24.77 116.59,24.77 117.73,24.77 118.87,24.77 121.16,24.77 127.38,27.56 126.49,28.32 125.6,29.08 124.71,29.84 125.73,27.56 138.43,3.81 115.57,22.86 116.84,22.86 118.11,22.86 123.19,24.13 123.83,25.02 125.22,25.02 124.46,24.13 140.84,21.97
  pour Top: 114.17,22.35 114.17,27.56 114.68,28.07 122.43,28.07 122.56,27.94 124.08,29.46 124.08,30.48 125.48,30.48 128.4,27.56 129.16,27.56 129.16,22.35
  pour Route2: 109.22,11.43 127,11.43 128.27,20.32 128.27,21.34 129.16,30.48 129.03,30.61 109.35,30.61 109.22,30.48
  pour Top: 140.97,0 140.97,12.7 135.89,17.78 129.54,17.78 129.54,15.24 132.08,12.7 132.08,0
  pour Route2: 132.08,1.27 140.97,1.27 140.97,12.7 134.62,19.05 129.54,19.05 129.54,15.24 132.08,12.7
  pour Top: 142.24,0 210.82,0 210.82,50.8 139.7,50.8 138.43,49.53 132.08,43.18 132.08,21.59 140.97,21.59 142.24,20.32
  pour Route2: 142.24,0 210.82,0 210.82,50.8 139.7,50.8 138.43,49.53 132.08,43.18 132.08,21.59 140.97,21.59 142.24,20.32
  pour Bottom: 132.08,0 210.82,0 210.82,52.07 116.84,52.07 114.3,49.53 114.3,11.43 132.08,11.43
GNDL  (via drill 0.35, 0.35 layers 1-2)
  Top 0.152: CCOMMLP.1 v97.79,28.89 | CCOMMLN.2 v97.79,20.64 | CDVDD.1 v80.77,35.56 | v87.5,26.54 87.25,26.8 CNEG5V.1 | CREFHP.1 83.95,16.51 | 83.95,16.51 v83.95,15.62 | CAVDD.1 84.92,16.51 83.95,16.51 | v90.78,22.54 90.7,22.54 CCOMLPG.1 | CCOMLNG.1 v94.93,21.59 | ESDCOML.3 v90.17,11.43 | TEMPL.9 TEMPL.10 TEMPL.11 TEMPL.12 TEMPL.13 TEMPL.14 TEMPL.15 TEMPL.16 | CBAT.1 v65.09,29.21 | CCVDD.1 v87.63,29.21 | IC1.39 75.68,23.38 IC1.65
  Top 0.305: CNPN2.1 v104.14,33.02 | IC1.50 78.18,31.19 v78.74,31.75 | IC1.46 82.34,26.88 v82.55,26.67 | IC1.36 82.26,21.88 v82.55,21.59 | CNPN1.1 v90.17,35.56 | RCB0.1 66.04,9.91 64.6,8.47 64.6,4.36 CBL.1
  Bottom 0.152: CTSREF1.1 88.36,42.03 TEMPL.16
  other vias: 85.22,23.75 88.52,26.04 85.98,22.99 86.74,22.35 87.38,23.24 86.49,23.75 89.53,24.77 90.68,24.77 91.82,23.5 92.84,23.5 93.85,23.5 95,23.5 96.01,23.5 91.82,24.77 92.96,24.77 94.11,24.77 95.25,24.77 96.39,24.77 96.27,26.04 95.25,26.04 94.23,26.04 93.09,26.04 91.95,26.04 90.81,26.04 89.66,26.04 83.44,23.24 84.33,22.48 85.22,21.72 86.11,20.95 95.5,31.11 92.71,30.86 88.01,30.86 93.85,19.18 95.63,19.18
  pour Top: 96.65,27.18 96.65,23.24 96.14,22.73 88.39,22.73 88.27,22.86 86.74,21.34 86.74,20.32 85.34,20.32 82.42,23.24 81.66,23.24 81.66,27.18
  pour Top: 80.01,30.48 78.74,30.48 78.74,32.26 78.87,32.38 80.01,33.53 80.01,36.32 105.92,36.32 106.68,35.56 106.68,31.75 106.68,30.48
  pour Top: 82.55,22.86 83.44,21.97 83.44,20.45 86.11,17.78 86.36,17.78 86.36,16.51 82.55,12.7 74.93,5.08 74.93,0 1.27,0 1.27,52.07 95.25,52.07 96.52,50.8 96.52,41.91 93.98,39.37 91.44,36.83 78.74,36.83 77.47,35.56 77.47,30.48 77.47,29.21 80.01,29.21 79.5,28.7 79.5,27.56 79.5,23.37 80.01,22.86
  pour Route2: 81.92,29.72 102.11,29.72 102.23,29.59 102.23,10.54 101.85,10.16 95,10.16 94.36,10.79 87.76,10.79 86.87,11.68 86.87,19.94 87,20.07 85.47,20.07 81.92,23.62
  pour Bottom: 1.27,50.8 96.52,50.8 96.52,11.43 83.82,11.43 78.74,6.35 78.74,0 77.47,1.27 1.27,1.27
  pour Route2: 80.01,30.48 78.74,30.48 78.74,32.26 78.87,32.38 80.01,33.53 80.01,36.32 105.92,36.32 106.68,35.56 106.68,31.75 106.68,30.48
LDOIN
  Top 0.305: CNPN2.2 100.19,33.58 T1.E 98.5,32.78 98.5,32.76 93.75,28.02 82.45,28.02 81.81,27.38 IC1.47
LDOIN-1
  Top 0.152: IC2.47 130.03,23.3 129.32,23.3 129.19,23.16 129.19,15.67 129.14,15.62 129.14,14.37 134.25,9.26 134.25,7.13 135.18,6.2 T2.E
  Top 0.305: T2.E 135.18,5.22 CNPN2-1.2
N$1
  Top 0.152: ESDCOMH.1 124.36,15.12 RCOMHP.1 CCOMHP.2
N$2
  Top 0.152: ESDCOMH.2 119.47,15.12 RCOMHN.1 120.02,13.12 CCOMHN.2
N$4  (via drill 0.35)
  Top 0.152: IC1.64 70.46,29.87 v69.85,30.48
  Route2 0.152: v69.85,30.48 58.21,30.48 SR.1
N$5
  Top 0.152: RCB1.1 61.47,11.43 60.96,11.43 60.96,4.92 CBL.2
N$6
  Top 0.152: RCB2.1 57.09,11.37 57.02,11.43 55.88,11.43 55.88,4.04 CBL.3
N$7  (via drill 0.35)
  Top 0.152: IC1.63 71.56,29.99 71.56,30.7 71.12,31.14 v71.12,31.75
  Route2 0.152: SR.2 51.67,42.52 51.67,42.36 62.27,31.75 v71.12,31.75
N$8
  Top 0.152: CBL.4 52.4,4.75 52.7,5.07 RCB3.1
N$12
  Top 0.152: CBL.5 47.62,4.18 RCB4.1
N$14  (via drill 0.35)
  other vias: 94.74,17.27
N$15
  Top 0.152: RCB5.1 42.55,9.28 42.85,8.97 42.85,3.61 CBL.6
N$18
  Top 0.152: CBL.9 54.17,10.29 55.17,11.29 55.17,17.11 54.61,17.67 RCB8.1
N$21
  Top 0.152: CBL.10 49.97,15.79 50.09,15.91 50.09,20.12 RCB9.1
N$27
  Top 0.152: CBL.7 62.57,9.8 64.06,11.29 64.06,17.11 63.5,17.67 RCB6.1
N$29
  Top 0.152: IC1.41 87.38,24.38 88.27,23.5 90.81,23.5 91.86,22.44 CCOMLNG.2 91.02,20.75 RCOML.1 RCOMLN.2
N$31
  Top 0.152: RCB7.1 59.05,17.67 59.62,17.11 59.62,9.08 CBL.8
N$33
  Top 0.152: IC1.37 80.79,22.26 82.74,22.26 83.16,21.84 83.16,19.42 CREFHP.2
N$34
  Top 0.152: RVC0.1 30.91,10.58 30.91,10.59 | 30.91,10.59 CVC0.2 | 30.91,10.59 30.91,8.96 30.39,8.44 30.39,4.44 VCL.1
N$35
  Top 0.152: CVC0.1 27.52,10.79 RVC1.1 26.67,10.58 | 26.67,10.58 25.83,10.58 CVC1.2 | VCL.2 26.67,4.92 26.67,10.58
N$36
  Top 0.152: CVC1.1 22.44,10.79 RVC2.1 | RVC2.1 20.75,10.58 CVC2.2 | VCL.3 22.23,4.67 RVC2.1
N$37
  Top 0.152: CVC2.1 18.62,10.58 17.78,10.58 | 17.78,10.58 RVC3.1 15.67,10.58 CVC3.2 | VCL.4 17.78,4.43 17.78,10.58
N$38
  Top 0.152: CVC4.2 10.59,10.58 RVC4.1 12.28,10.79 CVC3.1 13.76,4.61 VCL.5
N$39
  Top 0.152: CVC5.2 5.51,10.58 RVC5.1 7.2,10.79 CVC4.1 8.68,3.73 VCL.6
N$40
  Top 0.152: RVC6.1 29.74,14.5 | 29.74,14.5 29.63,14.61 CVC6.2 27.83,14.61 27.1,15.33 8.13,15.33 CVC5.1 | VCL.7 28.28,8.71 29.77,10.2 29.77,11.39 29.74,11.43 29.74,14.5
N$41
  Top 0.152: CVC6.1 24.98,14.61 24.87,14.5 RVC7.1 | RVC7.1 23.29,14.39 CVC7.2 | VCL.8 24.08,9.59 24.69,10.2 24.69,14.32 RVC7.1
N$42
  Top 0.152: CVC7.1 19.9,14.61 RVC8.1 | RVC8.1 19.58,14.5 19.47,14.61 CVC8.2 | VCL.9 19.88,10.08 19.76,10.2 19.76,14.32 RVC8.1
N$43
  Top 0.152: CVC8.1 14.82,14.61 RVC9.1 | RVC9.1 14.39,14.61 CVC9.2 | VCL.10 14.61,8.9 RVC9.1
N$44
  Top 0.152: RVC10.1 9.74,14.61 CVC9.1 11.21,13.01 9.6,11.39 9.6,9.71 VCL.11
N$46
  Top 0.152: CAVDD.2 83.46,21.78 83.46,21.97 82.55,22.88 IC1.38
N$48
  Top 0.152: IC1.44 83.58,25.88 CNEG5V.2
N$49
  Top 0.152: IC1.40 84.07,23.88 86.36,21.59 CCOMLPG.2 89.32,20.32 RCOML.2 RCOMLP.2
N$50
  Top 0.152: CDVDD.2 78.68,30.08 IC1.49
N$59
  Top 0.152: RCOMML.2 100.75,23.07 RCOMMLN.2 99.91,21.59 CCOMMLN.1 97.79,24.13 88.9,24.13 88.15,24.88 IC1.42
N$60
  Top 0.152: IC1.43 97.35,25.38 CCOMMLP.2 98.63,25.82 RCOMMLP.2 100.75,26.46 RCOMML.1
N$61
  Top 0.152: RCOMMLN.1 CCOMMN.2
N$62
  Top 0.152: RCOMMLP.1 CCOMMP.2
N$65
  Top 0.305: T1.C 97.57,33.83 96.82,34.58 95.12,34.58 RNPN.1 CNPN1.2
N$67
  Top 0.152: ESDCOML.2 88.36,15.12 RCOMLP.1 87.63,12.91 CCOMLP.2
N$68
  Top 0.152: ESDCOML.1 91.98,15.12 RCOMLN.1 CCOMLN.2
N$72
  Top 0.152: CBH.3 154.94,46.76 154.94,39.37 153.8,39.37 RCB2-1.1
N$73
  Top 0.152: RCB1-1.1 149.35,39.37 149.86,39.37 149.86,45.88 CBH.2
N$75
  Top 0.152: CBH.4 158.12,45.73 RCB3-1.1
N$78
  Top 0.152: CBH.5 163.19,46.62 RCB4-1.1
N$81
  Top 0.152: RCB5-1.1 168.28,41.52 167.97,41.83 167.97,47.19 CBH.6
N$84
  Top 0.152: CBH.7 148.25,41 146.76,39.51 146.76,33.7 147.32,33.13 RCB6-1.1
N$87
  Top 0.152: RCB7-1.1 151.76,33.13 151.2,33.7 151.2,41.72 CBH.8
N$90
  Top 0.152: CBH.9 156.65,40.51 155.65,39.51 155.65,33.7 156.21,33.13 RCB8-1.1
N$93
  Top 0.152: CBH.10 160.85,35.01 160.73,34.88 160.73,30.68 RCB9-1.1
N$99
  Top 0.152: RVC0-1.1 179.91,40.22 | 179.91,40.22 CVC0-1.2 | 179.91,40.22 179.91,41.84 180.43,42.36 180.43,46.36 VCH.1
N$100
  Top 0.152: CVC0-1.1 183.3,40.01 RVC1-1.1 184.15,40.22 | 184.15,40.22 184.99,40.22 CVC1-1.2 | VCH.2 184.15,45.88 184.15,40.22
N$101
  Top 0.152: CVC1-1.1 188.38,40.01 RVC2-1.1 | RVC2-1.1 190.07,40.22 CVC2-1.2 | VCH.3 188.59,46.12 RVC2-1.1
N$102
  Top 0.152: CVC2-1.1 192.2,40.22 193.04,40.22 | 193.04,40.22 RVC3-1.1 195.15,40.22 CVC3-1.2 | VCH.4 193.04,46.37 193.04,40.22
N$103
  Top 0.152: CVC4-1.2 200.23,40.22 RVC4-1.1 198.54,40.01 CVC3-1.1 197.06,46.2 VCH.5
N$104
  Top 0.152: CVC5-1.2 205.31,40.22 RVC5-1.1 203.62,40.01 CVC4-1.1 202.15,47.08 VCH.6
N$105
  Top 0.152: RVC6-1.1 181.08,36.3 | 181.08,36.3 181.19,36.2 CVC6-1.2 182.99,36.2 183.72,35.47 202.69,35.47 CVC5-1.1 | VCH.7 182.54,42.09 181.05,40.6 181.05,39.41 181.08,39.37 181.08,36.3
N$106
  Top 0.152: CVC6-1.1 185.84,36.2 RVC7-1.1 | RVC7-1.1 187.53,36.41 CVC7-1.2 | VCH.8 186.74,41.21 186.13,40.6 186.13,36.48 RVC7-1.1
N$107
  Top 0.152: CVC7-1.1 190.92,36.2 RVC8-1.1 | RVC8-1.1 191.35,36.2 CVC8-1.2 | VCH.9 190.94,40.72 191.06,40.6 191.06,36.48 RVC8-1.1
N$108
  Top 0.152: CVC8-1.1 196,36.2 RVC9-1.1 | RVC9-1.1 196.43,36.2 CVC9-1.2 | VCH.10 196.22,41.9 RVC9-1.1
N$109
  Top 0.152: RVC10-1.1 201.08,36.2 CVC9-1.1 199.6,37.79 201.22,39.41 201.22,41.09 VCH.11
N$111
  Top 0.152: IC2.37 130.03,28.54 128.08,28.54 127.66,28.96 127.66,31.38 CREFHP-1.2
N$112
  Top 0.152: CAVDD-1.2 127.36,29.02 127.36,28.83 128.27,27.92 IC2.38
N$113
  Top 0.152: IC2.44 130.03,24.8 128.08,24.8 127.66,24.38 127.66,23.88 128.36,23.18 CNEG5V-1.2
N$114
  Top 0.152: CDVDD-1.2 132.14,19.83 IC2.49
N$125
  Top 0.152: RCOMMHN.2 110.07,23.5 RCOMMH.1 112.83,23.91 CCOMMHN.2 118.96,23.71 121.67,26.42 IC2.41
N$126
  Top 0.152: RCOMMHP.2 110.49,27.52 RCOMMH.2 112.83,25.61 CCOMMHP.1 114.13,26.92 127.89,26.92 128.27,26.92 IC2.40
N$130
  Top 0.305: CNPN1-1.2 RNPN-1.1 136.18,10.29 136.18,8.59 135.43,7.84 T2.C
N$131
  Top 0.152: IC2.43 130.13,25.4 127,25.4 123.61,22.01 CCOMHPG.2 123.61,18.62 RCOMH.1 124.46,16.09 RCOMHP.2
N$132
  Top 0.152: IC2.42 123.71,25.92 119.8,22.01 CCOMHNG.2 121.07,20.32 RCOMH.2 119.38,16.09 RCOMHN.2
NPNB
  Top 0.305: T1.B 94.46,31.75 82.55,31.75 80.67,29.87 IC1.48
NPNB-1
  Top 0.152: IC2.48 130.15,16.2 129.44,15.49 129.44,14.86 T2.B
TEMP1  (via drill 0.35)
  Top 0.152: v62.23,36.83 63.91,36.83 65.13,35.61 71.07,35.61 72.68,34 IC1.61
  Route15 0.152: TEMPL.1 57.15,46.66 57.15,40.64 60.96,36.83 v62.23,36.83
  Bottom 0.152: TEMPL.1 57.15,46.66 TEMPR1.2
TEMP2  (via drill 0.35)
  Top 0.152: v64.77,36.83 66.45,36.83 67.36,35.92 71.4,35.92 73.18,34.13 IC1.60
  Route15 0.152: TEMPL.2 60.96,46.27 60.96,40.64 v64.77,36.83
  Bottom 0.152: TEMPL.2 60.96,46.27 TEMPR2.2
TEMP3  (via drill 0.35)
  Top 0.152: v67.31,36.83 68.99,36.83 69.6,36.22 71.73,36.22 73.68,34.27 IC1.59
  Route15 0.152: TEMPL.3 64.77,45.88 64.77,39.37 v67.31,36.83
  Bottom 0.152: TEMPL.3 65.41,46.52 TEMPR3.2
TEMP4  (via drill 0.35)
  Top 0.152: v69.85,36.83 72.39,36.83 74.18,35.04 IC1.58
  Route15 0.152: TEMPL.4 69.85,46.76 v69.85,36.83
  Bottom 0.152: TEMPL.4 69.85,46.76 TEMPR4.2
TEMP5  (via drill 0.35)
  Top 0.152: IC1.57 74.68,35.81 v73.66,36.83
  Route15 0.152: TEMPL.5 73.66,46.37 v73.66,36.83
  Bottom 0.152: TEMPL.5 74.3,47.01 TEMPR5.2
TEMP6  (via drill 0.35)
  Top 0.152: v75.56,37.47 75.18,37.08 IC1.56
  Route15 0.152: TEMPL.6 77.47,45.98 77.47,39.37 v75.56,37.47
  Bottom 0.152: TEMPL.6 79.96,46.94 78.11,45.09 TEMPR6.2
TEMP7  (via drill 0.35)
  Top 0.152: v76.83,37.47 75.68,36.31 IC1.55
  Route15 0.152: TEMPL.7 82.55,46.86 82.55,40.64 79.38,37.47 v76.83,37.47
  Bottom 0.152: TEMPL.7 82.55,46.86 TEMPR7.2
TEMP8  (via drill 0.35)
  Top 0.152: v76.29,34.29 76.18,34.18 IC1.54
  Route15 0.152: TEMPL.8 86.36,46.47 86.36,38.1 82.55,34.29 v76.29,34.29
  Bottom 0.152: TEMPL.8 86.36,46.47 TEMPR8.2
TEMP9  (via drill 0.35 layers 1-15)
  Top 0.152: IC2.61 138.26,20.81 138.26,20.1 139.31,19.05 v140.97,19.05
  Route15 0.152: TEMPH.1 179.25,4.32 179.25,11.68 173.15,17.78 140.99,17.78 140.97,17.8 v140.97,19.05
  Bottom 0.152: TEMPH.1 179.07,4.14 TEMPR9.2
TEMP10  (via drill 0.35 layers 1-15)
  Top 0.152: v138.43,19.05 137.64,19.84 IC2.60
  Route15 0.152: TEMPH.2 175.26,4.53 175.26,13.97 172.21,17.02 141.32,17.02 140.71,17.62 139.85,17.62 v138.43,19.05
  Bottom 0.152: TEMPH.2 175.26,4.53 TEMPR10.2
TEMP11  (via drill 0.35)
  Top 0.152: v168.91,13.97 165.96,13.97 163.4,16.53 140.83,16.53 140.71,16.41 140.21,16.41 137.26,19.36 137.26,20.81 IC2.59
  Route15 0.152: TEMPH.3 171.45,4.92 171.45,11.43 v168.91,13.97
  Bottom 0.152: TEMPH.3 170.81,4.29 TEMPR11.2
TEMP12  (via drill 0.35)
  Top 0.152: v163.83,13.97 162.04,15.76 140.43,15.76 136.76,19.43 136.76,20.81 IC2.58
  Route15 0.152: TEMPH.4 164.66,6.02 163.38,7.3 163.38,8.36 163.83,8.81 v163.83,13.97
  Bottom 0.152: TEMPH.4 166.37,4.04 TEMPR12.2
TEMP13  (via drill 0.35)
  Top 0.152: v162.56,13.97 161.54,14.99 140.77,14.99 136.26,19.5 136.26,20.81 IC2.57
  Route15 0.152: TEMPH.5 162.56,4.43 v162.56,13.97
  Bottom 0.152: TEMPH.5 161.93,3.79 TEMPR13.2
TEMP14  (via drill 0.35)
  Top 0.152: v160.66,13.34 159.31,14.69 140.64,14.69 135.76,19.57 135.76,20.81 IC2.56
  Route15 0.152: TEMPH.6 158.75,4.82 158.75,11.43 v160.66,13.34
  Bottom 0.152: TEMPH.6 156.26,3.86 158.12,5.71 TEMPR14.2
TEMP15  (via drill 0.35)
  Top 0.152: v156.72,13.84 156.18,14.38 140.52,14.38 135.26,19.64 135.26,20.81 IC2.55
  Route15 0.152: TEMPH.7 153.67,3.94 153.67,10.79 v156.72,13.84
  Bottom 0.152: TEMPH.7 153.67,3.94 TEMPR15.2
TEMP16  (via drill 0.35 layers 1-15)
  Top 0.152: IC2.54 134.76,20.81 134.76,19.7 141,13.46 v149.99,13.46
  Route15 0.152: TEMPH.8 149.99,4.46 v149.99,13.46
  Bottom 0.152: TEMPH.8 149.86,4.33 TEMPR16.2
TSREF  (via drill 0.35)
  Top 0.305: IC1.51 77.68,31.96 v78.74,33.02
  Bottom 0.305: v78.74,33.02 78.74,37.88 TEMPR6.1 | CTSREF1.2 TEMPR8.1 TEMPR7.1 TEMPR6.1 | TEMPR6.1 TEMPR5.1 TEMPR4.1 TEMPR3.1 TEMPR2.1 TEMPR1.1
TSREF-1  (via drill 0.35)
  Top 0.305: IC2.51 133.14,18.84 v132.08,17.78
  Bottom 0.305: TEMPR9.1 TEMPR10.1 TEMPR11.1 TEMPR12.1 TEMPR13.1 TEMPR14.1 TEMPR15.1 TEMPR16.1 CTSREF2.2 141.15,17.18 141.15,17.3 140.67,17.78 v132.08,17.78
VC0  (via drill 0.35)
  Top 0.152: RVC0.2 33.23,12.28 v33.66,12.7 | IC1.35 80.79,21.26 81.5,21.26 82.41,20.35 v82.41,12.84
  Route15 0.152: v33.66,12.7 33.78,12.57 81.41,12.57 81.68,12.84 v82.41,12.84
VC0-1  (via drill 0.35)
  Top 0.152: RVC0-1.2 177.59,38.52 v177.16,38.1 | IC2.35 130.03,29.54 129.32,29.54 128.41,30.45 v128.41,37.96
  Route15 0.152: v177.16,38.1 177.04,38.23 129.41,38.23 129.14,37.96 v128.41,37.96
VC1  (via drill 0.35)
  Top 0.152: RVC1.2 28.16,12.28 v28.57,12.7 | v80.9,11.94 80.67,12.17 IC1.33
  Route15 0.152: v28.57,12.7 32.8,12.7 33.4,12.09 80.74,12.09 v80.9,11.94
VC1-1  (via drill 0.35)
  Top 0.152: RVC1-1.2 182.66,38.52 v182.25,38.1 | v129.92,38.86 130.15,38.63 IC2.33
  Route15 0.152: v182.25,38.1 178.02,38.1 177.42,38.71 130.08,38.71 v129.92,38.86
VC2  (via drill 0.35)
  Top 0.152: RVC2.2 22.64,12.7 v23.5,12.7 | IC1.31 78.18,16.66 78.71,16.13 78.71,12.71 v80,11.42
  Route15 0.152: v80,11.42 79.64,11.79 28.63,11.79 27.72,12.7 v23.5,12.7
VC2-1  (via drill 0.35)
  Top 0.152: RVC2-1.2 188.18,38.1 v187.32,38.1 | IC2.31 132.64,34.14 132.11,34.67 132.11,38.09 v130.82,39.38
  Route15 0.152: v130.82,39.38 131.18,39.01 182.19,39.01 183.1,38.1 v187.32,38.1
VC3  (via drill 0.35)
  Top 0.152: RVC3.2 17.57,12.7 v18.41,12.7 | IC1.29 77.18,15.75 77.44,15.49 77.44,11.46 v77.72,11.18
  Route15 0.152: v18.41,12.7 19.93,11.18 v77.72,11.18
VC3-1  (via drill 0.35)
  Top 0.152: RVC3-1.2 193.25,38.1 v192.41,38.1 | IC2.29 133.64,35.05 133.38,35.31 133.38,39.34 v133.1,39.62
  Route15 0.152: v192.41,38.1 190.89,39.62 v133.1,39.62
VC4  (via drill 0.35)
  Top 0.152: RVC4.2 12.91,12.28 v13.34,12.7 | v76.33,10.57 76.18,10.72 IC1.27
  Route15 0.152: v76.33,10.57 76.03,10.88 19.38,10.88 17.56,12.7 v13.34,12.7
VC4-1  (via drill 0.35)
  Top 0.152: RVC4-1.2 197.91,38.52 v197.49,38.1 | v134.49,40.23 134.64,40.08 IC2.27
  Route15 0.152: v134.49,40.23 134.79,39.92 191.44,39.92 193.26,38.1 v197.49,38.1
VC5  (via drill 0.35)
  Top 0.152: RVC5.2 8.47,12.28 v8.89,12.7 | IC1.25 75.18,15.08 74.96,14.86 74.96,10.5 v75.18,10.27
  Route15 0.152: v8.89,12.7 11.32,10.27 v75.18,10.27
VC5-1  (via drill 0.35)
  Top 0.152: RVC5-1.2 202.35,38.52 v201.93,38.1 | IC2.25 135.64,35.72 135.86,35.94 135.86,40.3 v135.64,40.53
  Route15 0.152: v201.93,38.1 199.5,40.53 v135.64,40.53
VC6  (via drill 0.35)
  Top 0.152: RVC6.2 31.28,16.09 v31.37,16 | IC1.23 74.18,15.56 73.69,15.06 73.69,10.48 v74.51,9.66
  Route15 0.152: v74.51,9.66 68.64,9.66 68.34,9.96 41.89,9.96 39.46,7.53 39.46,6.3 37.94,4.78 31.91,4.78 30.39,6.3 30.39,7.53 27.95,9.96 10.77,9.96 8.28,12.45 8.28,12.95 8.64,13.31 28.67,13.31 v31.37,16
VC6-1  (via drill 0.35)
  Top 0.152: RVC6-1.2 179.54,34.71 v179.45,34.8 | IC2.23 136.64,35.24 137.13,35.74 137.13,40.32 v136.31,41.14
  Route15 0.152: v136.31,41.14 142.18,41.14 142.48,40.84 168.93,40.84 171.36,43.27 171.36,44.5 172.88,46.02 178.91,46.02 180.43,44.5 180.43,43.27 182.87,40.84 200.05,40.84 202.54,38.35 202.54,37.85 202.18,37.49 182.15,37.49 v179.45,34.8
VC7  (via drill 0.35)
  Top 0.152: RVC7.2 26.45,16.09 v26.54,16 | IC1.21 73.18,17.17 72.64,16.63 72.64,16 73.03,15.62 v73.03,9.02
  Route15 0.152: v73.03,9.02 72.58,9.02 68.34,4.78 66.2,4.78 64.68,6.3 64.68,7.53 63.1,9.11 44.66,9.11 40.02,4.47 29.83,4.47 24.64,9.66 10.64,9.66 7.98,12.32 7.98,13.08 8.51,13.61 24.15,13.61 v26.54,16
VC7-1  (via drill 0.35)
  Top 0.152: RVC7-1.2 184.37,34.71 v184.28,34.8 | IC2.21 137.64,33.63 138.18,34.17 138.18,34.8 137.79,35.18 v137.79,41.78
  Route15 0.152: v137.79,41.78 138.24,41.78 142.48,46.02 144.62,46.02 146.14,44.5 146.14,43.27 147.72,41.69 166.16,41.69 170.8,46.33 180.99,46.33 186.18,41.14 200.18,41.14 202.84,38.48 202.84,37.72 202.31,37.19 186.67,37.19 v184.28,34.8
VC8  (via drill 0.35)
  Top 0.152: RVC8.2 20.92,16.09 v20.95,16.13 | IC1.19 72.15,18.37 72.15,17.66 71.89,17.39 71.58,17.39 71.22,17.04 71.22,16.54 72.15,15.61 v72.15,7.73
  Route15 0.152: v72.15,7.73 71.73,7.73 68.17,4.17 29.7,4.17 24.52,9.36 10.51,9.36 7.67,12.2 7.67,13.2 8.39,13.92 18.74,13.92 v20.95,16.13
VC8-1  (via drill 0.35)
  Top 0.152: RVC8-1.2 189.9,34.71 v189.87,34.67 | IC2.19 138.67,32.43 138.67,33.15 138.93,33.41 139.24,33.41 139.59,33.76 139.59,34.27 138.67,35.19 v138.67,43.07
  Route15 0.152: v138.67,43.07 139.09,43.07 142.66,46.63 181.12,46.63 186.31,41.44 200.31,41.44 203.15,38.6 203.15,37.6 202.43,36.88 192.08,36.88 v189.87,34.67
VC9  (via drill 0.35)
  Top 0.152: RVC9.2 15.84,16.09 v16,16.26 | IC1.17 71.18,17.42 70.92,17.16 70.92,7.18 v71.5,6.6
  Route15 0.152: v71.5,6.6 71.03,6.6 68.29,3.86 13.64,3.86 7.37,10.13 7.37,13.33 8.26,14.22 13.97,14.22 v16,16.26
VC9-1  (via drill 0.35)
  Top 0.152: RVC9-1.2 194.98,34.71 v194.82,34.54 | IC2.17 139.64,33.38 139.9,33.64 139.9,43.62 v139.32,44.2
  Route15 0.152: v139.32,44.2 139.79,44.2 142.53,46.94 197.18,46.94 203.45,40.67 203.45,37.47 202.56,36.58 196.85,36.58 v194.82,34.54
VC10  (via drill 0.35)
  Top 0.152: RVC10.2 10.76,16.09 v10.92,16.26 | v66.8,19.3 66.7,19.4 66.7,20.57 67.06,20.93 67.56,20.93 67.61,20.88 IC1.15
  Route2 0.152: v10.92,16.26 13.97,19.3 v66.8,19.3
VC10-1  (via drill 0.35)
  Top 0.152: RVC10-1.2 200.06,34.71 v199.9,34.54 | v144.02,31.5 144.12,31.4 144.12,30.23 143.76,29.87 143.26,29.87 143.21,29.92 IC2.15
  Route2 0.152: v199.9,34.54 196.85,31.5 v144.02,31.5
VC_CB_HIGH
  Top 0.152: IC1.13 IC1.12 IC1.11 IC1.10 IC1.9 IC1.8 IC1.7 IC1.6 IC1.5 IC1.4 IC1.3 IC1.2 IC1.1 68.16,28.91 CBAT.2 RBAT.1
VC_CB_HIGH-1
  Top 0.152: IC2.13 IC2.12 IC2.11 IC2.10 IC2.9 IC2.8 IC2.7 IC2.6 IC2.5 IC2.4 IC2.3 IC2.2 IC2.1 142.66,21.89 CBAT-1.2 RBAT-1.1